# Altium PCB STM32F407ZGT6(Mini)核心板--尺寸图（PCB格式）.PcbDoc
Units mil, origin at the board's own origin, x right, y up, seen from the top; angles counter-clockwise.
Board outline 2350 x 1850 mil, 2 copper layers (Top Layer, Bottom Layer); 7 components, 0 nets, 289 pads, 0 vias.
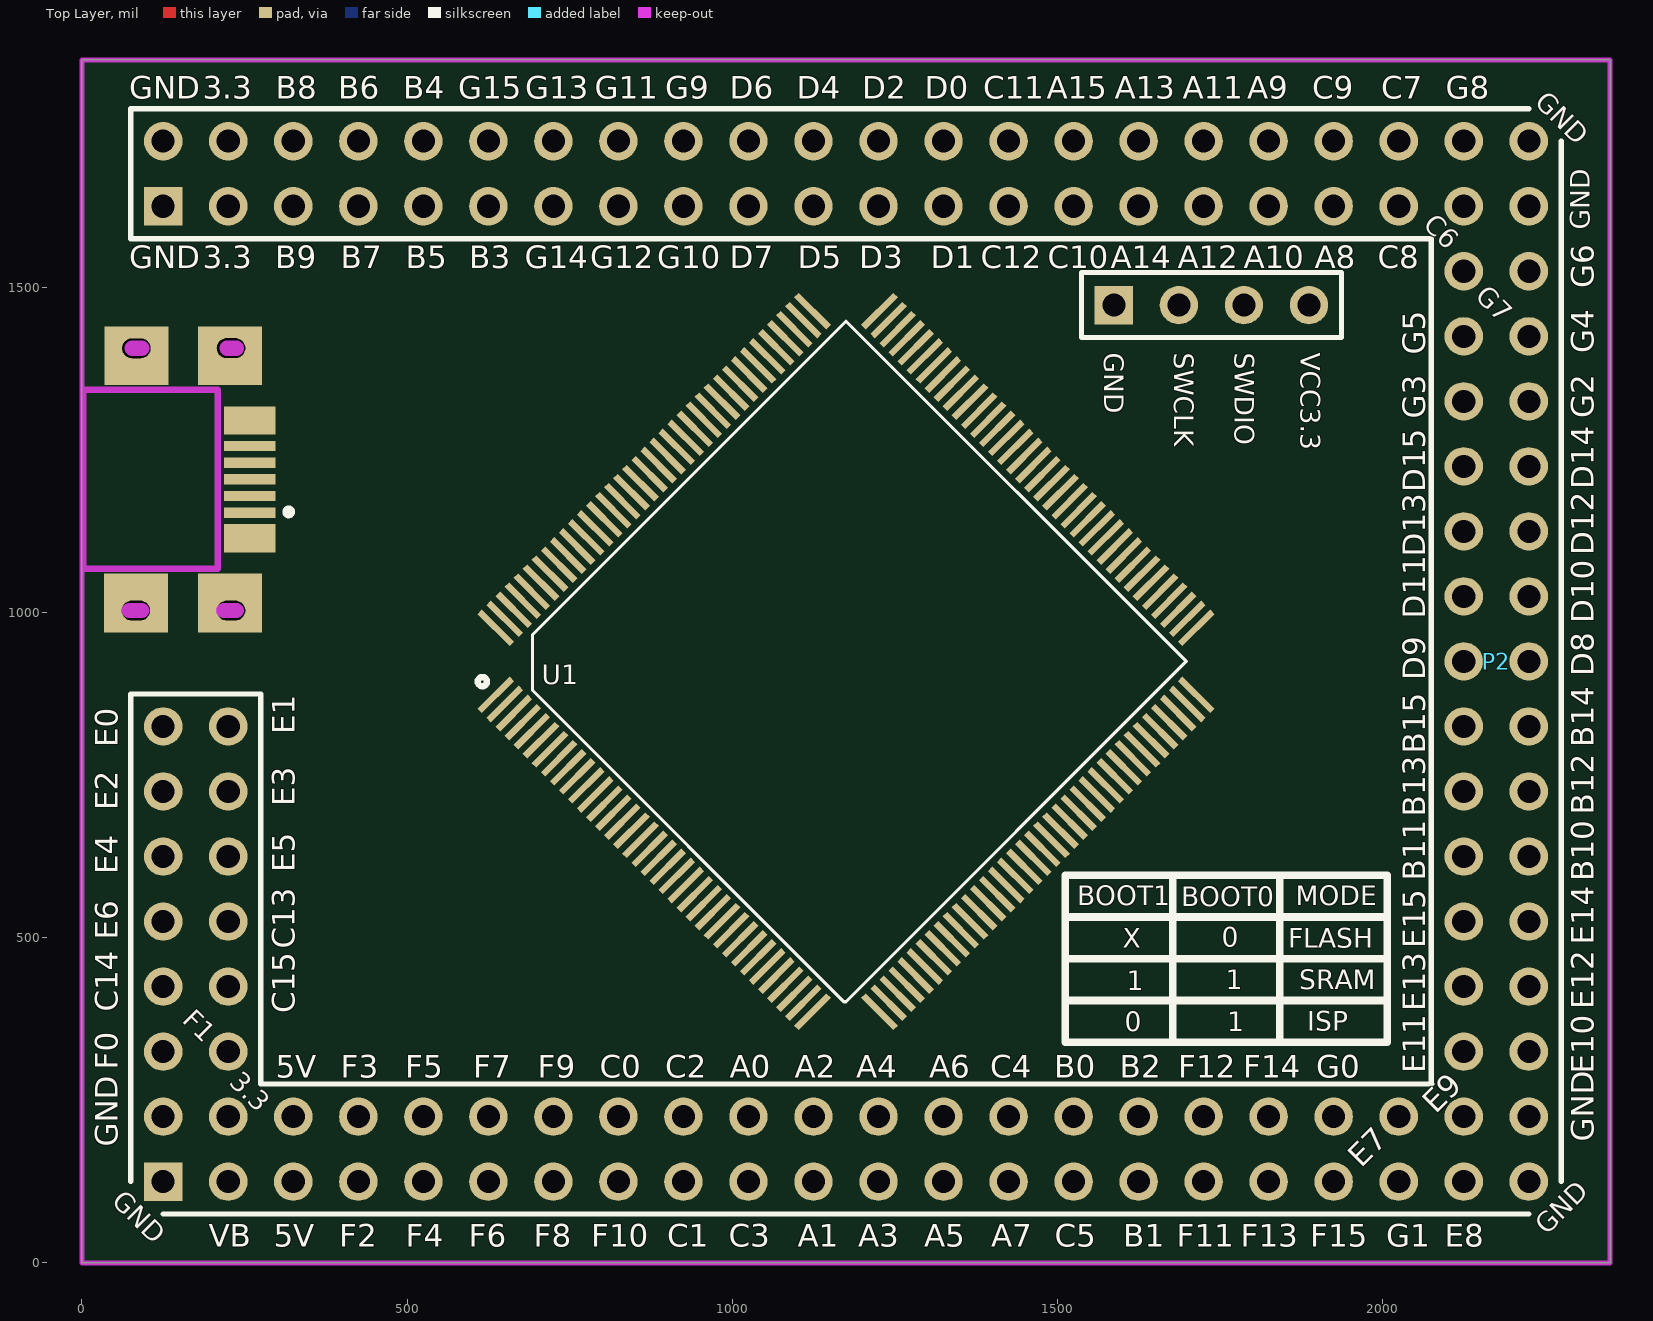
[diagram p0: Top Layer view]
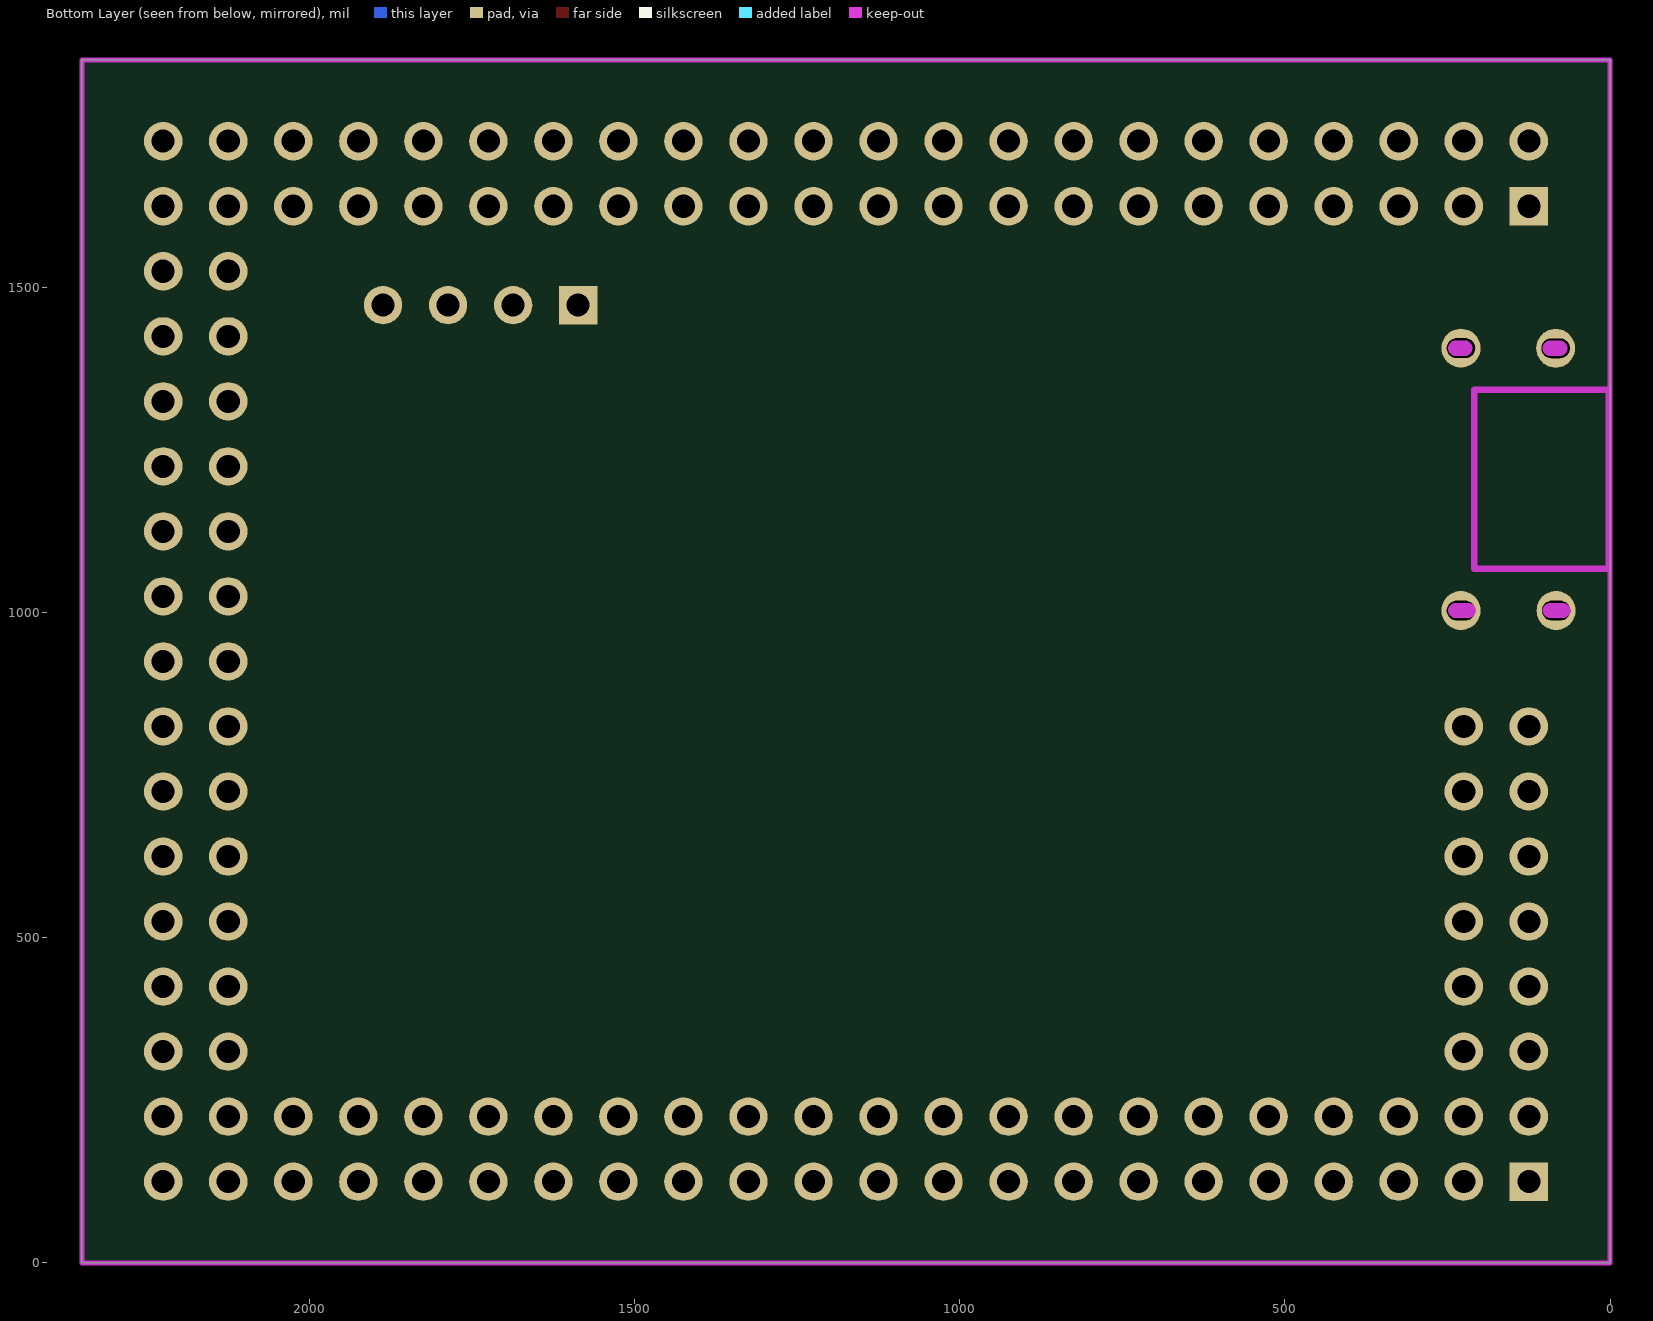
[diagram p1: Bottom Layer view, seen from below]

## Layer stack, top to bottom
Top Solder: solder mask 0.4, Solder Resist, Dk 3.5
Top Layer: signal copper 1.4
Dielectric1: dielectric 12.6, FR-4, Dk 4.8
Bottom Layer: signal copper 1.4
Bottom Solder: solder mask 0.4, Solder Resist, Dk 3.5

## Board outline
1561,0 0,0 0,1787 0,1850 97,1850 2350,1850 2350,432 2350,0 2321,0

## Design rules (kind name [scope] priority, off if disabled: settings)
Clearance [All] p1: gap=8
FabricationTestpoint [(IsPad And (OnTopLayer Or OnBottomLayer))] p1: side=3 testpointundercomponent=TRUE minsize=40 maxsize=100 preferedsize=60 minholesize=0 maxholesize=40 preferedholesize=32 testpointgrid=1 allowsidetop=TRUE allowsidebottom=TRUE usegrid=TRUE gridtolerance=0.01
HoleToHoleClearance [All] p1: gap=0 allowstackedmicrovias=TRUE
MinimumSolderMaskSliver [All] p1: minsoldermaskwidth=0
PolygonConnect PolygonConnect_1 [All vs (InPadClass('All Pads'))] p1: connectstyle=Relief reliefconductorwidth=30 reliefentries=4 polygonreliefangle="90 Angle" airgapwidth=10
PolygonConnect [All] p2: connectstyle=Direct reliefconductorwidth=30 reliefentries=4 polygonreliefangle="90 Angle" airgapwidth=10
RoutingVias [All] p1: holewidth=10 width=50 viastyle="Through Hole" minholewidth=5 minwidth=20 maxholewidth=30 maxwidth=30
SilkToSilkClearance [All] p1: silktosilkclearance=0
SilkToSolderMaskClearance SilkscreenOverComponentPads [IsPad] p1: minsilkscreentomaskgap=0 clearancetoexposedcopper=TRUE
SolderMaskExpansion [All] p1: expansion=4
Width [All] p1: maxlimit=50 minlimit=6 preferedwidth=10 minimp=50.000000 maximp=50.000000 favimp=50.000000
24 further rules are at their usual default settings.

## Classes and differential pairs
component class STM32F103ZET6原理图: U1

## Components (designator, comment, footprint, x,y, rotation, side; value= is the part's Value field where it differs from the comment)
P1 "Header 22X2" HDR2X22 125,125 r0 top locked
P2 "Header 13X2" HDR2X13 2125,1525 r270 top locked
P3 "Header 6X2" HDR2X6 225,325 r90 top locked
P4 "Header 22X2" HDR2X22 125,1625 r0 top locked
P5 "4P,SWD" HDR1X4 1587,1473 r0 top
U1 "STM32F103ZE" TQFP-144 1175,925 r45 top locked
? "Comment" "Micro_USB_v2 - duplicate" 248,1205 r270 top

## Footprints (in the part's own frame and the unit in brackets; to place one, negate y for a bottom-side part, rotate by r counter-clockwise, add the part's x,y. Pads: shape width x height; smd on the part's side, far side on the other; paste and mask are expansions set on the pad)
HDR1X4 [mm]
  rect 1.5x1.5 hole 0.9: 1(0,0)
  round 1.5 hole 0.9: 2(2.54,0) 3(5.08,0) 4(7.62,0)
  silkscreen extent -1.27,-1.27 8.89,1.27
HDR2X6 [mm]
  round 1.5 hole 0.9: 1(0,0) 2(0,2.54) 3(2.54,0) 4(2.54,2.54) 5(5.08,0) 6(5.08,2.54) 7(7.62,0) 8(7.62,2.54) 9(10.16,0) 10(10.16,2.54) 11(12.7,0) 12(12.7,2.54)
  silkscreen extent -1.27,-1.27 13.97,3.81
HDR2X13 [mm]
  round 1.5 hole 0.9: 1(0,0) 2(0,2.54) 3(2.54,0) 4(2.54,2.54) 5(5.08,0) 6(5.08,2.54) 7(7.62,0) 8(7.62,2.54) 9(10.16,0) 10(10.16,2.54) 11(12.7,0) 12(12.7,2.54) 13(15.24,0) 14(15.24,2.54) 15(17.78,0) 16(17.78,2.54) 17(20.32,0) 18(20.32,2.54) 19(22.86,0) 20(22.86,2.54) 21(25.4,0) 22(25.4,2.54) 23(27.94,0) 24(27.94,2.54) 25(30.48,0) 26(30.48,2.54)
  silkscreen extent -1.27,-1.27 31.75,3.81
HDR2X22 [mm]
  rect 1.5x1.5 hole 0.9: 1(0,0)
  round 1.5 hole 0.9: 2(0,2.54) 3(2.54,0) 4(2.54,2.54) 5(5.08,0) 6(5.08,2.54) 7(7.62,0) 8(7.62,2.54) 9(10.16,0) 10(10.16,2.54) 11(12.7,0) 12(12.7,2.54) 13(15.24,0) 14(15.24,2.54) 15(17.78,0) 16(17.78,2.54) 17(20.32,0) 18(20.32,2.54) 19(22.86,0) 20(22.86,2.54) 21(25.4,0) 22(25.4,2.54) 23(27.94,0) 24(27.94,2.54) 25(30.48,0) 26(30.48,2.54) 27(33.02,0) 28(33.02,2.54) 29(35.56,0) 30(35.56,2.54) 31(38.1,0) 32(38.1,2.54) 33(40.64,0) 34(40.64,2.54) 35(43.18,0) 36(43.18,2.54) 37(45.72,0) 38(45.72,2.54) 39(48.26,0) 40(48.26,2.54) 41(50.8,0) 42(50.8,2.54) 43(53.34,0) 44(53.34,2.54)
  silkscreen extent -1.27,-1.27 54.61,3.81
"Micro_USB_v2 - duplicate" [mm]
  round 1.524 hole 0.762 slot 1.1 at 90 deg: 0(-5.125,-0.475) 0(-5.12,-4.175) 0(5.125,-0.475) 0(5.125,-4.191)
  rect 0.4x2 smd: 1(1.3,0.254) 2(0.65,0.254) 3(0,0.254) 4(-0.65,0.254) 5(-1.3,0.254)
  rect 2.3x2.5 smd: ""(-4.826,-0.508) ""(-4.826,-4.175) ""(4.826,-0.508) ""(4.826,-4.191)
  rect 1.1x2 smd: ""(-2.3,0.254) ""(2.3,0.254)
  Keep-Out Layer lines w0.254: -3.45,-6.25 3.5,-6.25 3.5,-1 ; -3.5,-6.25 -3.5,-1 ; 3.45,-1 -3.45,-1
  Keep-Out Layer lines w0.6: 5.125,-4.445 5.125,-3.962 ; -5.12,-4.335 -5.12,-3.962 ; 5.125,-0.762 5.125,-0.262 ; -5.125,-0.635 -5.125,-0.262
  silkscreen extent 1.15,1.65 1.4,1.9
TQFP-144 [mil]
  rect 70x10 smd: 1(-417.32,344.49) 2(-417.32,324.8) 3(-417.32,305.12) 4(-417.32,285.43) 5(-417.32,265.75) 6(-417.32,246.06) 7(-417.32,226.38) 8(-417.32,206.69) 9(-417.32,187.01) 10(-417.32,167.32) 11(-417.32,147.64) 12(-417.32,127.95) 13(-417.32,108.27) 14(-417.32,88.58) 15(-417.32,68.9) 16(-417.32,49.21) 17(-417.32,29.53) 18(-417.32,9.84) 19(-417.32,-9.84) 20(-417.32,-29.53) 21(-417.32,-49.21) 22(-417.32,-68.9) 23(-417.32,-88.58) 24(-417.32,-108.27) 25(-417.32,-127.95) 26(-417.32,-147.64) 27(-417.32,-167.32) 28(-417.32,-187.01) 29(-417.32,-206.69) 30(-417.32,-226.38) 31(-417.32,-246.06) 32(-417.32,-265.75) 33(-417.32,-285.43) 34(-417.32,-305.12) 35(-417.32,-324.8) 36(-417.32,-344.49) 73(417.32,-344.49) 74(417.32,-324.8) 75(417.32,-305.12) 76(417.32,-285.43) 77(417.32,-265.75) 78(417.32,-246.06) 79(417.32,-226.38) 80(417.32,-206.69) 81(417.32,-187.01) 82(417.32,-167.32) 83(417.32,-147.64) 84(417.32,-127.95) 85(417.32,-108.27) 86(417.32,-88.58) 87(417.32,-68.9) 88(417.32,-49.21) 89(417.32,-29.53) 90(417.32,-9.84) 91(417.32,9.84) 92(417.32,29.53) 93(417.32,49.21) 94(417.32,68.9) 95(417.32,88.58) 96(417.32,108.27) 97(417.32,127.95) 98(417.32,147.64) 99(417.32,167.32) 100(417.32,187.01) 101(417.32,206.69) 102(417.32,226.38) 103(417.32,246.06) 104(417.32,265.75) 105(417.32,285.43) 106(417.32,305.12) 107(417.32,324.8) 108(417.32,344.49)
  rect 10x70 smd: 37(-344.49,-417.32) 38(-324.8,-417.32) 39(-305.12,-417.32) 40(-285.43,-417.32) 41(-265.75,-417.32) 42(-246.06,-417.32) 43(-226.38,-417.32) 44(-206.69,-417.32) 45(-187.01,-417.32) 46(-167.32,-417.32) 47(-147.64,-417.32) 48(-127.95,-417.32) 49(-108.27,-417.32) 50(-88.58,-417.32) 51(-68.9,-417.32) 52(-49.21,-417.32) 53(-29.53,-417.32) 54(-9.84,-417.32) 55(9.84,-417.32) 56(29.53,-417.32) 57(49.21,-417.32) 58(68.9,-417.32) 59(88.58,-417.32) 60(108.27,-417.32) 61(127.95,-417.32) 62(147.64,-417.32) 63(167.32,-417.32) 64(187.01,-417.32) 65(206.69,-417.32) 66(226.38,-417.32) 67(246.06,-417.32) 68(265.75,-417.32) 69(285.43,-417.32) 70(305.12,-417.32) 71(324.8,-417.32) 72(344.49,-417.32) 109(344.49,417.32) 110(324.8,417.32) 111(305.12,417.32) 112(285.43,417.32) 113(265.75,417.32) 114(246.06,417.32) 115(226.38,417.32) 116(206.69,417.32) 117(187.01,417.32) 118(167.32,417.32) 119(147.64,417.32) 120(127.95,417.32) 121(108.27,417.32) 122(88.58,417.32) 123(68.9,417.32) 124(49.21,417.32) 125(29.53,417.32) 126(9.84,417.32) 127(-9.84,417.32) 128(-29.53,417.32) 129(-49.21,417.32) 130(-68.9,417.32) 131(-88.58,417.32) 132(-108.27,417.32) 133(-127.95,417.32) 134(-147.64,417.32) 135(-167.32,417.32) 136(-187.01,417.32) 137(-206.69,417.32) 138(-226.38,417.32) 139(-246.06,417.32) 140(-265.75,417.32) 141(-285.43,417.32) 142(-305.12,417.32) 143(-324.8,417.32) 144(-344.49,417.32)
  silkscreen extent -424,-370 370,381

## Nets (pads, with @x,y where several pads share a name; then routed paths per layer and width w, separated by ;. In a path a pad name is that pad's centre, name@x,y a point inside that pad or via, vN(x,y) a via of type N, cw(c..) or ccw(c..) an arc to the next point about the centre after c; other vN are vias at no path point)
pads on no net: ?. ?.0 ?.1 ?.2 ?.3 ?.4 ?.5 P1.1 P1.2 P1.3 P1.4 P1.5 P1.6 P1.7 P1.8 P1.9 P1.10 P1.11 P1.12 P1.13 P1.14 P1.15 P1.16 P1.17 P1.18 P1.19 P1.20 P1.21 P1.22 P1.23 P1.24 P1.25 P1.26 P1.27 P1.28 P1.29 P1.30 P1.31 P1.32 P1.33 P1.34 P1.35 P1.36 P1.37 P1.38 P1.39 P1.40 P1.41 P1.42 P1.43 P1.44 P2.1 P2.2 P2.3 P2.4 P2.5 P2.6 P2.7 P2.8 P2.9 P2.10 P2.11 P2.12 P2.13 P2.14 P2.15 P2.16 P2.17 P2.18 P2.19 P2.20 P2.21 P2.22 P2.23 P2.24 P2.25 P2.26 P3.1 P3.2 P3.3 P3.4 P3.5 P3.6 P3.7 P3.8 P3.9 P3.10 P3.11 P3.12 P4.1 P4.2 P4.3 P4.4 P4.5 P4.6 P4.7 P4.8 P4.9 P4.10 P4.11 P4.12 P4.13 P4.14 P4.15 P4.16 P4.17 P4.18 P4.19 P4.20 P4.21 P4.22 P4.23 P4.24 P4.25 P4.26 P4.27 P4.28 P4.29 P4.30 P4.31 P4.32 P4.33 P4.34 P4.35 P4.36 P4.37 P4.38 P4.39 P4.40 P4.41 P4.42 P4.43 P4.44 P5.1 P5.2 P5.3 P5.4 U1.1 U1.2 U1.3 U1.4 U1.5 U1.6 U1.7 U1.8 U1.9 U1.10 U1.11 U1.12 U1.13 U1.14 U1.15 U1.16 U1.17 U1.18 U1.19 U1.20 U1.21 U1.22 U1.23 U1.24 U1.25 U1.26 U1.27 U1.28 U1.29 U1.30 U1.31 U1.32 U1.33 U1.34 U1.35 U1.36 U1.37 U1.38 U1.39 U1.40 U1.41 U1.42 U1.43 U1.44 U1.45 U1.46 U1.47 U1.48 U1.49 U1.50 U1.51 U1.52 U1.53 U1.54 U1.55 U1.56 U1.57 U1.58 U1.59 U1.60 U1.61 U1.62 U1.63 U1.64 U1.65 U1.66 U1.67 U1.68 U1.69 U1.70 U1.71 U1.72 U1.73 U1.74 U1.75 U1.76 U1.77 U1.78 U1.79 U1.80 U1.81 U1.82 U1.83 U1.84 U1.85 U1.86 U1.87 U1.88 U1.89 U1.90 U1.91 U1.92 U1.93 U1.94 U1.95 U1.96 U1.97 U1.98 U1.99 U1.100 U1.101 U1.102 U1.103 U1.104 U1.105 U1.106 U1.107 U1.108 U1.109 U1.110 U1.111 U1.112 U1.113 U1.114 U1.115 U1.116 U1.117 U1.118 U1.119 U1.120 U1.121 U1.122 U1.123 U1.124 U1.125 U1.126 U1.127 U1.128 U1.129 U1.130 U1.131 U1.132 U1.133 U1.134 U1.135 U1.136 U1.137 U1.138 U1.139 U1.140 U1.141 U1.142 U1.143 U1.144

## Keep-outs
Keep-Out Layer:
  lines w8: 0,0 2350,0 2350,1850 0,1850 0,0

## Silkscreen, mask and mechanical layers (free items; w line width, h text height)
Top Overlay:
  lines w11.81: 1512.25,403.56 2007.25,403.56 ; 1512.25,467.81 2007.25,467.81 ; 1512.25,532.06 2007.25,532.06 ; 1677.25,339.31 1677.25,596.31 ; 1842.25,339.31 1842.25,596.31 ; 1512.25,339.31 1512.25,596.31 2007.25,596.31 2007.25,339.31 1512.25,339.31
  text "GND" at 73,1790 h35
  text "3.3" at 186,1790 h35
  text "B8" at 298,1790 h35
  text "B6" at 394,1790 h35
  text "B4" at 494,1790 h35
  text "G15" at 579,1790 h35
  text "G13" at 682,1790 h35
  text "G11" at 789,1790 h35
  text "G9" at 897,1790 h35
  text "D6" at 996,1790 h35
  text "D4" at 1099,1790 h35
  text "D2" at 1200,1790 h35
  text "D0" at 1296,1790 h35
  text "C11" at 1386,1790 h35
  text "A15" at 1484,1790 h35
  text "A13" at 1588,1790 h35
  text "A11" at 1693,1790 h35
  text "A9" at 1792,1790 h35
  text "C9" at 1892,1790 h35
  text "C7" at 1998,1790 h35
  text "G8" at 2097,1790 h35
  text "GND" at 2233,1783 h30 r315
  text "C6" at 2061,1595 h30 r315
  text "GND" at 2319,1589 h30 r90
  text "GND" at 73,1530 h35
  text "3.3" at 186,1530 h35
  text "B9" at 297,1530 h35
  text "B7" at 398,1530 h35
  text "B5" at 498,1530 h35
  text "B3" at 596,1530 h35
  text "G14" at 681,1530 h35
  text "G12" at 782,1530 h35
  text "G10" at 885,1530 h35
  text "D7" at 996,1530 h35
  text "D5" at 1101,1530 h35
  text "D3" at 1195,1530 h35
  text "D1" at 1305,1530 h35
  text "C12" at 1382,1530 h35
  text "C10" at 1485,1530 h35
  text "A14" at 1582,1530 h35
  text "A12" at 1685,1530 h35
  text "A10" at 1787,1530 h35
  text "A8" at 1896,1530 h35
  text "C8" at 1993,1530 h35
  text "G6" at 2325,1499 h35 r90
  text "G7" at 2141,1485 h30 r315
  text "GND" at 1572,1400 h30 r270
  text "SWCLK" at 1680,1400 h30 r270
  text "SWDIO" at 1773,1400 h30 r270
  text "VCC3.3" at 1874,1400 h30 r270
  text "G4" at 2325,1399 h35 r90
  text "G5" at 2066,1397 h35 r90
  text "G2" at 2325,1299 h35 r90
  text "G3" at 2066,1298 h35 r90
  text "D14" at 2325,1190 h35 r90
  text "D15" at 2066,1185 h35 r90
  text "D12" at 2325,1088 h35 r90
  text "D13" at 2066,1086 h35 r90
  text "D11" at 2066,991 h35 r90
  text "D10" at 2325,984 h35 r90
  text "D8" at 2325,902 h35 r90
  text "D9" at 2066,896 h35 r90
  text "E1" at 327,813 h35 r90
  text "E0" at 55,793 h35 r90
  text "B14" at 2325,793 h35 r90
  text "B15" at 2066,783 h35 r90
  text "E3" at 327,702 h35 r90
  text "E2" at 55,696 h35 r90
  text "B12" at 2325,689 h35 r90
  text "B13" at 2066,686 h35 r90
  text "E5" at 327,601 h35 r90
  text "E4" at 55,598 h35 r90
  text "B11" at 2066,588 h35 r90
  text "B10" at 2325,587 h35 r90
  text "BOOT1" at 1530.25,549.81 h30
  text "MODE" at 1866.25,549.81 h30
  text "BOOT0" at 1690.25,548.81 h30
  text "E6" at 55,497 h35 r90
  text "E14" at 2325,489 h35 r90
  text "0" at 1752.6,486.03 h30
  text "X" at 1600.6,485.03 h30
  text "FLASH" at 1855.25,484.81 h30
  text "E15" at 2066,484 h35 r90
  text "C13" at 327,483 h35 r90
  text "1" at 1758.6,421.03 h30
  text "SRAM" at 1872.25,420.81 h30
  text "1" at 1606.6,419.03 h30
  text "E12" at 2325,390 h35 r90
  text "E13" at 2066,387 h35 r90
  text "C14" at 55,386 h35 r90
  text "C15" at 327,384 h35 r90
  text "F1" at 153,372 h30 r315
  text "ISP" at 1884.25,356.81 h30
  text "0" at 1603.6,356.03 h30
  text "1" at 1761.6,356.03 h30
  text "F0" at 55,297 h35 r90
  text "E11" at 2066,292 h35 r90
  text "E10" at 2325,291 h35 r90
  text "5V" at 298,285 h35
  text "F3" at 398,285 h35
  text "F5" at 497,285 h35
  text "F7" at 602,285 h35
  text "F9" at 701,285 h35
  text "C0" at 796,285 h35
  text "C2" at 897,285 h35
  text "A0" at 996,285 h35
  text "A2" at 1096,285 h35
  text "A4" at 1191,285 h35
  text "A6" at 1303,285 h35
  text "C4" at 1397,285 h35
  text "B0" at 1495,285 h35
  text "B2" at 1596,285 h35
  text "F12" at 1686,285 h35
  text "F14" at 1786,285 h35
  text "G0" at 1898,285 h35
  text "3.3" at 225,276 h30 r315
  text "E9" at 2082,228 h35 r45
  text "GND" at 2325,186 h35 r90
  text "GND" at 55,179 h35 r90
  text "E7" at 1967,145 h35 r45
  text "GND" at 44,93 h30 r315
  text "GND" at 2253,42 h30 r45
  text "VB" at 195,25 h35
  text "5V" at 295,25 h35
  text "F2" at 396,25 h35
  text "F4" at 498,25 h35
  text "F6" at 595,25 h35
  text "F8" at 695,25 h35
  text "F10" at 783,25 h35
  text "C1" at 900,25 h35
  text "C3" at 995,25 h35
  text "A1" at 1101,25 h35
  text "A3" at 1194,25 h35
  text "A5" at 1295,25 h35
  text "A7" at 1398,25 h35
  text "C5" at 1496,25 h35
  text "B1" at 1601,25 h35
  text "F11" at 1684,25 h35
  text "F13" at 1782,25 h35
  text "F15" at 1889,25 h35
  text "G1" at 2006,25 h35
  text "E8" at 2096,25 h35

## Dimensions
125,125 to 125,825 on Top Overlay
2225,1725 to 2225,125 on Top Overlay
125,1725 to 2225,1725 on Top Overlay